# EAGLE board STM32-Schematic-Design (EAGLE 9.6.2)
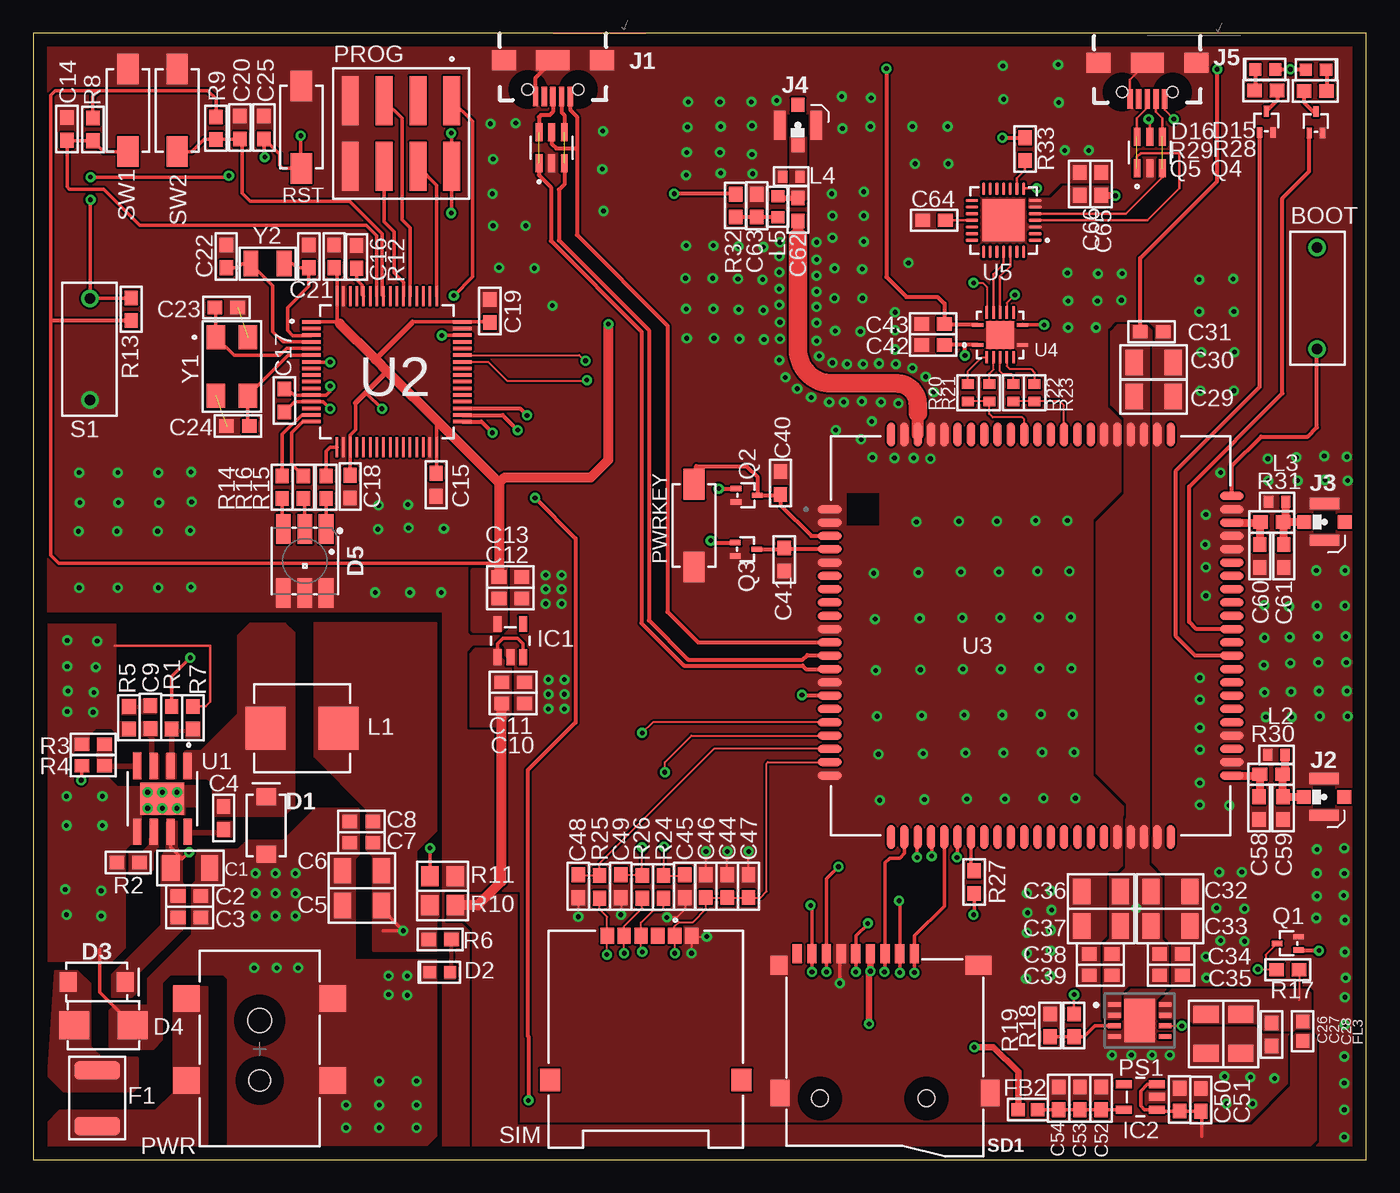
[diagram p0: board, top side]
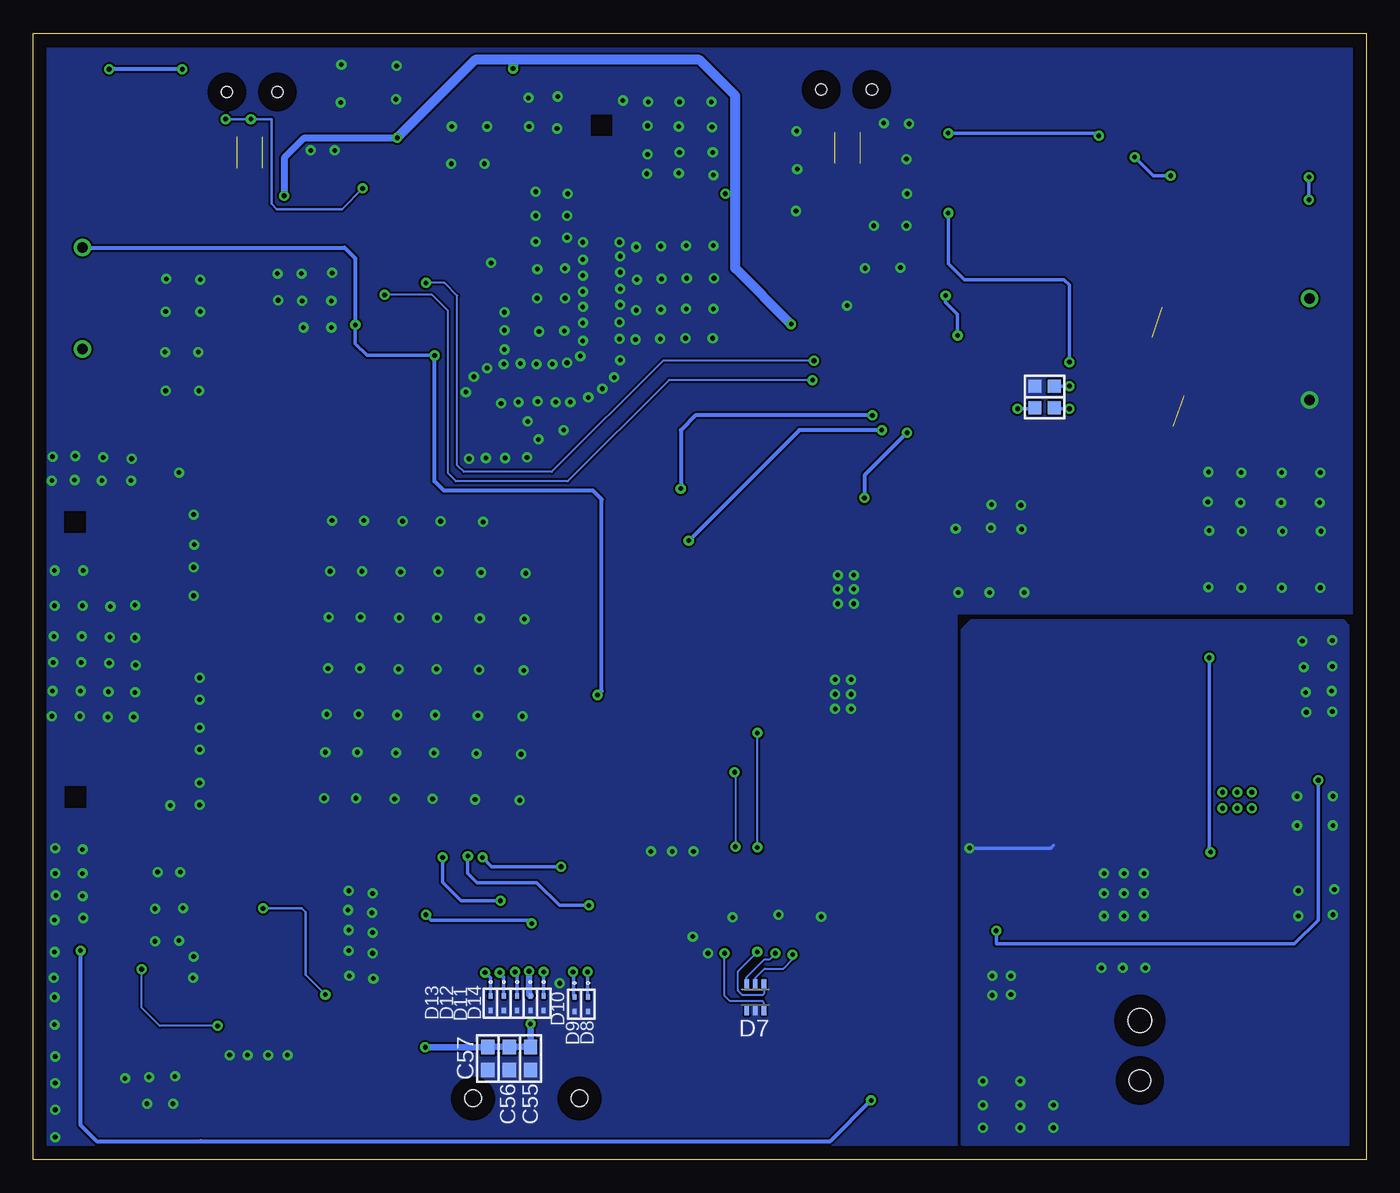
[diagram p1: board, bottom side, seen from below]

Size 100.15 x 84.6 mm. Coordinates in mm from the lower left corner, seen from the top.
Outline: 0,0 100.15,0 100.15,84.6 0,84.6 0,0
Copper layers (1*16): Top 0.035mm / dielectric 1.5mm / Bottom 0.035mm
Design rules "default": minimum track width 6mil, minimum drill 0.35mm, track to track 6mil, track to pad 6mil, pad to pad 6mil, via to via 6mil, smd to smd 6mil, copper to edge 40mil, drill to drill 6mil, minimum pad ring 10mil, minimum via ring 8mil, stop-mask expansion 4mil, vias tented up to drill 0mil, thermal gap 10mil

## Footprints (pad centres in the part's own frame; a part is rotated, then mirrored left to right if it is on the bottom)
418117270901 = drill 0.8: 1 0,-3.81; A1 0,3.81
CAPC3216X190N = smd 1.29 x 1.91: 1 -1.46,0; 2 1.46,0
C0603 = smd 1.1 x 1: 1 -0.909,0; 2 0.809,0
SMA-DIODE = smd 1.27 x 1.47: A -2.15,0; C 2.15,0
LEDC1608X65N = smd 0.91 x 0.93: A 0.76,0; C -0.76,0
DIONM5436X245N = smd 2.25 x 2.1: 1 -2.2,0; 2 2.2,0
LED-TRICOLOR-5050 = smd 2.2 x 1.1: 1 -2.4,1.6; 2 -2.4,0; 3 -2.4,-1.6; 4 2.4,-1.6; 5 2.4,0; 6 2.4,1.6
SOT95P280X145-6N = smd 1.36 x 0.6: 1 -1.175,0.95; 2 -1.175,0; 3 -1.175,-0.95; 4 1.175,-0.95; 5 1.175,0; 6 1.175,0.95
SC70-6 = smd 0.35 x 0.8: 1 -0.65,-0.95; 2 0,-0.95; 3 0.65,-0.95; 4 0.65,0.95; 5 0,0.95; 6 -0.65,0.95
SODFL1060X40N = smd 0.41 x 0.31: 1 -0.55,0; 2 0.55,0
FUSC4632X194N = smd 1.35 x 3.43: 1 -2.098,0; 2 2.098,0
BEADC1608X95N = smd 1 x 0.97: 1 -0.735,0; 2 0.735,0
SOT95P280X145-5N = smd 1.2 x 0.6: 1 -1.25,0.95; 2 -1.25,0; 3 -1.25,-0.95; 4 1.25,-0.95; 5 1.25,0.95
USB-B-MICRO-SMD = smd 1.45 x 0.4: D+ 2.725,0; D- 2.725,0.65; GND 2.725,-1.3; ID 2.725,-0.65; VBUS 2.725,1.3 | smd 1.5 x 1.8: SHIELD1 0,3.685; SHIELD2 0,-3.685 | smd 1.5 x 2.5: SHIELD3 0,0 | hole 0.85: 2.2,1.9; 2.2,-1.9
U.FL = smd 2.2 x 0.85: 1 0,1.375; 2 0,-1.375 | smd 1.05 x 1: FEED 1.525,0; NC -1.525,0
INDPM7266X300N = smd 3 x 3.2: 1 -2.75,0; 2 2.75,0
INDC1005X45 = smd 0.7 x 0.9: 1 -0.65,0; 2 0.65,0
INDC1608X95N = smd 0.9 x 0.97: 1 -0.785,0; 2 0.785,0
SAMTEC_TSM-104-02-S-DV-P = smd 1.27 x 3.68: 01 3.81,2.475; 02 3.81,-2.475; 03 1.27,2.475; 04 1.27,-2.475; 05 -1.27,2.475; 06 -1.27,-2.475; 07 -3.81,2.475; 08 -3.81,-2.475
SON80P400X400X100-9N = smd 0.95 x 0.35: 1 -1.9,1.2; 2 -1.9,0.4; 3 -1.9,-0.4; 4 -1.9,-1.2; 5 1.9,-1.2; 6 1.9,-0.4; 7 1.9,0.4; 8 1.9,1.2 | smd 2.3 x 3.23: 9 0,0
GCT_DCJ200-05-A-XX-X_REVA = smd 2 x 2: 1.1 -5.5,3.8; 1.2 -5.5,-2.35; 2 5.5,-2.35; 3 5.5,3.8 | hole 1.8: 0,2.15 | hole 1.6: 0,-2.35
SW_1437566-3 = smd 2.3 x 1.6: 1 -3.08,0; 2 3.12,0
SOT50P160X90-3N = smd 0.8 x 0.4: 1 -0.8,0.5; 2 -0.8,-0.5; 3 0.8,0
R0603 = smd 1.1 x 1: 1 -0.85,0; 2 0.85,0
RESC2012X60 = smd 1.3 x 1.5: 1 -0.95,0; 2 0.95,0
RESC1005X40 = smd 0.7 x 0.9: 1 -0.65,0; 2 0.65,0
TF-PULL = smd 0.7 x 1.4: 1 -2.2,-7.62; 2 -1.1,-7.62; 3 0,-7.62; 4 1.1,-7.62; 5 2.2,-7.62; 6 3.3,-7.62; 7 4.4,-7.62; 8 5.5,-7.62; 9 6.6,-7.62 | smd 1.4 x 2: S1 -7.9,2.85; S2 7.9,2.85 | smd 1.28 x 1.4: S3 7.96,-6.75 | smd 1.95 x 1.4: S4 -7.025,-6.75 | hole 1.25: -3.1,3.25; 4.9,3.25
XUNPU_SMC-216 = smd 1 x 1.2: C1 -2.18,-10.85; C2 -3.45,-10.85; C3 0.36,-10.85; C4 -0.91,-10.85; C5 2.9,-10.85; C6 1.63,-10.85 | smd 1.5 x 1.7: S1 -7.2,0; S2 7.2,0
SOIC127P600X170-9N = smd 1.97 x 0.6: 1 -2.475,1.905; 2 -2.475,0.635; 3 -2.475,-0.635; 4 -2.475,-1.905; 5 2.475,-1.905; 6 2.475,-0.635; 7 2.475,0.635; 8 2.475,1.905 | smd 2.41 x 3.3: 9 0,0
QFP50P1200X1200X160-64N = smd 1.47 x 0.25: 1 -5.67,3.75; 2 -5.67,3.25; 3 -5.67,2.75; 4 -5.67,2.25; 5 -5.67,1.75; 6 -5.67,1.25; 7 -5.67,0.75; 8 -5.67,0.25; 9 -5.67,-0.25; 10 -5.67,-0.75; 11 -5.67,-1.25; 12 -5.67,-1.75; 13 -5.67,-2.25; 14 -5.67,-2.75; 15 -5.67,-3.25; 16 -5.67,-3.75; 33 5.67,-3.75; 34 5.67,-3.25; 35 5.67,-2.75; 36 5.67,-2.25; 37 5.67,-1.75; 38 5.67,-1.25; 39 5.67,-0.75; 40 5.67,-0.25; 41 5.67,0.25; 42 5.67,0.75; 43 5.67,1.25; 44 5.67,1.75; 45 5.67,2.25; 46 5.67,2.75; 47 5.67,3.25; 48 5.67,3.75 | smd 0.25 x 1.47: 17 -3.75,-5.67; 18 -3.25,-5.67; 19 -2.75,-5.67; 20 -2.25,-5.67; 21 -1.75,-5.67; 22 -1.25,-5.67; 23 -0.75,-5.67; 24 -0.25,-5.67; 25 0.25,-5.67; 26 0.75,-5.67; 27 1.25,-5.67; 28 1.75,-5.67; 29 2.25,-5.67; 30 2.75,-5.67; 31 3.25,-5.67; 32 3.75,-5.67; 49 3.75,5.67; 50 3.25,5.67; 51 2.75,5.67; 52 2.25,5.67; 53 1.75,5.67; 54 1.25,5.67; 55 0.75,5.67; 56 0.25,5.67; 57 -0.25,5.67; 58 -0.75,5.67; 59 -1.25,5.67; 60 -1.75,5.67; 61 -2.25,5.67; 62 -2.75,5.67; 63 -3.25,5.67; 64 -3.75,5.67
IC_SIM7600E-H = smd 1.8 x 0.6: 1 -15.1,9.5; 2 -15.1,8.5; 3 -15.1,7.5; 4 -15.1,6.5; 5 -15.1,5.5; 6 -15.1,4.5; 7 -15.1,3.5; 8 -15.1,2.5; 9 -15.1,1.5; 10 -15.1,0.5; 11 -15.1,-0.5; 12 -15.1,-1.5; 13 -15.1,-2.5; 14 -15.1,-3.5; 15 -15.1,-4.5; 16 -15.1,-5.5; 17 -15.1,-6.5; 18 -15.1,-7.5; 19 -15.1,-8.5; 20 -15.1,-9.5; 41 15.1,-9.5; 42 15.1,-8.5; 43 15.1,-7.5; 44 15.1,-6.5; 45 15.1,-5.5; 46 15.1,-4.5; 47 15.1,-3.5; 48 15.1,-2.5; 49 15.1,-1.5; 50 15.1,-0.5; 51 15.1,0.5; 52 15.1,1.5; 53 15.1,2.5; 54 15.1,3.5; 55 15.1,4.5; 56 15.1,5.5; 57 15.1,6.5; 58 15.1,7.5; 59 15.1,8.5; 60 15.1,9.5; 81 -15.1,-10.5; 82 15.1,-10.5; 85 15.1,10.5 | smd 0.6 x 1.8: 21 -9.5,-15.1; 22 -8.5,-15.1; 23 -7.5,-15.1; 24 -6.5,-15.1; 25 -5.5,-15.1; 26 -4.5,-15.1; 27 -3.5,-15.1; 28 -2.5,-15.1; 29 -1.5,-15.1; 30 -0.5,-15.1; 31 0.5,-15.1; 32 1.5,-15.1; 33 2.5,-15.1; 34 3.5,-15.1; 35 4.5,-15.1; 36 5.5,-15.1; 37 6.5,-15.1; 38 7.5,-15.1; 39 8.5,-15.1; 40 9.5,-15.1; 61 9.5,15.1; 62 8.5,15.1; 63 7.5,15.1; 64 6.5,15.1; 65 5.5,15.1; 66 4.5,15.1; 67 3.5,15.1; 68 2.5,15.1; 69 1.5,15.1; 70 0.5,15.1; 71 -0.5,15.1; 72 -1.5,15.1; 73 -2.5,15.1; 74 -3.5,15.1; 75 -4.5,15.1; 76 -5.5,15.1; 77 -6.5,15.1; 78 -7.5,15.1; 79 -8.5,15.1; 80 -9.5,15.1; 83 10.5,-15.1; 84 -10.5,-15.1; 86 -10.5,15.1; 87 10.5,15.1
QFN50P350X350X100-15N = smd 0.9 x 0.26: 1 -1.685,-0.75; 7 1.685,-0.75; 8 1.685,0.75; 14 -1.685,0.75 | smd 0.26 x 0.9: 2 -1,-1.685; 3 -0.5,-1.685; 4 0,-1.685; 5 0.5,-1.685; 6 1,-1.685; 9 1,1.685; 10 0.5,1.685; 11 0,1.685; 12 -0.5,1.685; 13 -1,1.685 | smd 2.05 x 2.05: 15 0,0
QFN50P500X500X100-29N = smd 0.97 x 0.26: 1 -2.37,1.5; 2 -2.37,1; 3 -2.37,0.5; 4 -2.37,0; 5 -2.37,-0.5; 6 -2.37,-1; 7 -2.37,-1.5; 15 2.37,-1.5; 16 2.37,-1; 17 2.37,-0.5; 18 2.37,0; 19 2.37,0.5; 20 2.37,1; 21 2.37,1.5 | smd 0.26 x 0.97: 8 -1.5,-2.37; 9 -1,-2.37; 10 -0.5,-2.37; 11 0,-2.37; 12 0.5,-2.37; 13 1,-2.37; 14 1.5,-2.37; 22 1.5,2.37; 23 1,2.37; 24 0.5,2.37; 25 0,2.37; 26 -0.5,2.37; 27 -1,2.37; 28 -1.5,2.37 | smd 3.15 x 3.15: 29 0,0
XTAL_ABMM2-8.000MHZ-E2-T = smd 1.8 x 1.4: 1 -2.2,-1.2; 2 2.2,-1.2; 3 2.2,1.2; 4 -2.2,1.2
XTAL_ABS07-32.768KHZ-T = smd 1.1 x 1.9: 1 -1.25,0; 2 1.25,0

## Placement (x,y rotation side)
BOOT  418117270901  [418117270901]  96.45,64.7 0 top
C1  100uF  [CAPC3216X190N]  11.8,21.9 180 top
C2  10uF  [C0603]  11.7,19.8 180 top
C3  0.1uF  [C0603]  11.7,18.2 180 top
C4  0.1uF  [C0603]  14.31,25.61 270 top
C5  100uF  [CAPC3216X190N]  24.7,19.1 0 top
C6  100uF  [CAPC3216X190N]  24.7,21.7 0 top
C7  22uF  [C0603]  24.7,23.8 0 top
C8  0.1uF  [C0603]  24.7,25.4 0 top
C9  150pF  [C0603]  8.8,33.2 270 top
C10  0.1uF  [C0603]  36,34.26 180 top
C11  10uF  [C0603]  36,35.86 180 top
C12  10uF  [C0603]  35.8,42.16 180 top
C13  0.1uF  [C0603]  35.8,43.76 180 top
C14  0.1uF  [C0603]  2.53,77.37 270 top
C15  10uF  [C0603]  30.27,50.74 90 top
C16  0.1uF  [C0603]  22.6,67.8 270 top
C17  0.1uF  [C0603]  18.86,56.97 270 top
C18  0.1uF  [C0603]  23.8,50.6 90 top
C19  0.1uF  [C0603]  34.3,63.7 270 top
C20  0.1uF  [C0603]  15.53,77.47 270 top
C21  14pF  [C0603]  20.7,67.8 270 top
C22  14pF  [C0603]  14.5,67.8 270 top
C23  27pF  [C0603]  14.45,64.01 180 top
C24  27pF  [C0603]  15.43,55.09 0 top
C25  0.1uF  [C0603]  17.33,77.47 270 top
C26  100uF  [CAPC3216X190N]  88.12,9.45 90 top
C27  100uF  [CAPC3216X190N]  90.73,9.45 90 top
C28  0.1uF  [C0603]  93.03,9.45 90 top
C29  100uF  [CAPC3216X190N]  84.18,57.33 180 top
C30  100uF  [CAPC3216X190N]  84.18,59.88 180 top
C31  0.1uF  [C0603]  83.98,62.18 180 top
C32  100uF  [CAPC3216X190N]  85.43,20.15 180 top
C33  100uF  [CAPC3216X190N]  85.43,17.55 180 top
C34  0.1uF  [C0603]  85.43,15.45 180 top
C35  33pF  [C0603]  85.43,13.85 180 top
C36  100uF  [CAPC3216X190N]  80.23,20.15 0 top
C37  100uF  [CAPC3216X190N]  80.23,17.55 0 top
C38  0.1uF  [C0603]  80.23,15.45 0 top
C39  33pF  [C0603]  80.23,13.85 0 top
C40  0.1uF  [C0603]  56.14,50.77 270 top
C41  0.1uF  [C0603]  56.41,45.12 90 top
C42  0.1uF  [C0603]  67.65,61.18 0 top
C43  0.1uF  [C0603]  67.55,62.78 180 top
C44  0.1uF  [C0603]  52.13,20.49 270 top
C45  22pF  [C0603]  48.95,20.59 90 top
C46  10uF  [C0603]  50.53,20.49 270 top
C47  10pF  [C0603]  53.73,20.49 270 top
C48  22pF  [C0603]  40.95,20.59 90 top
C49  22pF  [C0603]  44.15,20.59 90 top
C50  10uF  [C0603]  86.13,4.46 270 top
C51  0.1uF  [C0603]  87.73,4.45 270 top
C52  10uF  [C0603]  80.23,4.56 270 top
C53  0.1uF  [C0603]  78.63,4.56 270 top
C54  22pF  [C0603]  77.03,4.56 270 top
C55  10uF  [C0603]  62.79,7.66 90 bottom
C56  0.1uF  [C0603]  64.39,7.66 90 bottom
C57  10pF  [C0603]  65.99,7.66 90 bottom
C58  DNP  [C0603]  92.1,26.45 90 top
C59  DNP  [C0603]  93.9,26.45 90 top
C60  DNP  [C0603]  92.16,45.4 90 top
C61  DNP  [C0603]  93.96,45.4 90 top
C62  22pF  [C0603]  57.45,71.31 270 top
C63  33pF  [C0603]  54.35,71.7 90 top
C64  4.7uF  [C0603]  67.73,70.55 0 top
C65  0.1uF  [C0603]  80.22,73.24 270 top
C66  4.7uF  [C0603]  78.62,73.24 270 top
D1  SS14  [SMA-DIODE]  17.5,25.1 90 top
D2  LED  [LEDC1608X65N]  30.56,14.08 0 top
D3  SS14  [SMA-DIODE]  4.76,13.35 0 top
D4  TVS  [DIONM5436X245N]  5.27,10.11 0 top
D5  RGB LED  [LED-TRICOLOR-5050]  20.4,44.96 270 top
D6  USBLC6-2SC6  [SOT95P280X145-6N]  38.95,76 90 top
D7  SMF05  [SC70-6]  45.9,12.2 0 bottom
D8  ESD9M5  [SODFL1060X40N]  58.48,11.67 270 bottom
D9  ESD9M5  [SODFL1060X40N]  59.48,11.67 270 bottom
D10  ESD9M5  [SODFL1060X40N]  61.8,11.75 270 bottom
D11  ESD9M5  [SODFL1060X40N]  63.8,11.75 270 bottom
D12  ESD9M5  [SODFL1060X40N]  64.8,11.75 270 bottom
D13  ESD9M5  [SODFL1060X40N]  65.8,11.75 270 bottom
D14  ESD9M5  [SODFL1060X40N]  62.8,11.75 270 bottom
D15  LTW-C191TLA  [LEDC1608X65N]  96.37,81.86 180 top
D16  LTW-C191TLA  [LEDC1608X65N]  92.56,81.88 0 top
D17  USBLC6-2SC6  [SOT95P280X145-6N]  83.88,75.65 90 top
F1  1.5A/16V  [FUSC4632X194N]  4.81,4.62 270 top
FB2  [BEADC1608X95N]  74.73,3.76 180 top
FL1  FB100  [BEADC1608X95N]  24.16,56.48 180 bottom
FL2  FB101  [BEADC1608X95N]  24.16,58.08 180 bottom
FL3  FB1  [BEADC1608X95N]  95.37,9.65 90 top
IC1  TLV70333DBVR  [SOT95P280X145-5N]  35.84,38.98 90 top
IC2  LP5907MFX-3.0  [SOT95P280X145-5N]  83.18,4.71 180 top
J1  Modem USB  [USB-B-MICRO-SMD]  39.04,82.57 270 top
J2  U.FL  [U.FL]  96.98,27.25 180 top
J3  U.FL  [U.FL]  97.02,47.9 180 top
J4  U.FL  [U.FL]  57.45,77.7 270 top
J5  Modem USB  [USB-B-MICRO-SMD]  83.7,82.4 270 top
L1  15uH  [INDPM7266X300N]  20.2,32.4 0 top
L2  LXES15AAA1-153  [INDC1005X45]  93.4,30.4 0 top
L3  LXES15AAA1-153  [INDC1005X45]  93.46,49.4 0 top
L4  LXES15AAA1-153  [INDC1005X45]  56.95,73.84 180 top
L5  47nH  [INDC1608X95N]  55.94,71.56 270 top
PROG  Prog/Debug Conn  [SAMTEC_TSM-104-02-S-DV-P]  27.63,77.07 0 top
PS1  LD39200DPUR  [SON80P400X400X100-9N]  83.12,10.45 0 top
PWR  DC POWER JACK  [GCT_DCJ200-05-A-XX-X_REVA]  17.01,8.3 0 top
PWRKEY  PWR_KEY_SW  [SW_1437566-3]  49.64,47.6 90 top
Q1  100mA/50V  [SOT50P160X90-3N]  94.26,16.24 180 top
Q2  100mA/50V  [SOT50P160X90-3N]  53.6,49.9 0 top
Q3  100mA/50V  [SOT50P160X90-3N]  53.55,45.85 0 top
Q4  100mA/50V  [SOT50P160X90-3N]  96.37,77.91 90 top
Q5  100mA/50V  [SOT50P160X90-3N]  92.64,77.94 90 top
R1  100k  [R0603]  10.4,33.2 90 top
R2  100k  [R0603]  7.13,22.33 0 top
R3  40.2k  [R0603]  4.5,31.2 0 top
R4  210k  [R0603]  4.5,29.58 0 top
R5  100k  [R0603]  7.2,33.2 270 top
R6  2k  [R0603]  30.56,16.54 180 top
R7  24.9k  [R0603]  12,33.2 270 top
R8  10k  [R0603]  4.48,77.38 270 top
R9  10k  [R0603]  13.73,77.47 270 top
R10  0R  [RESC2012X60]  30.75,19.09 0 top
R11  0R  [RESC2012X60]  30.75,21.3 0 top
R12  10k  [R0603]  24.3,67.8 270 top
R13  10k  [R0603]  7.36,63.87 90 top
R14  2k  [R0603]  18.7,50.5 270 top
R15  2k  [R0603]  22,50.5 270 top
R16  2k  [R0603]  20.3,50.5 270 top
R17  10k  [R0603]  94.26,14.26 0 top
R18  6.6k  [R0603]  78.19,10.09 90 top
R19  1k  [R0603]  76.39,10.09 270 top
R20  0R  [RESC1005X40]  70.23,57.6 90 top
R21  0R  [RESC1005X40]  71.83,57.6 90 top
R22  0R  [RESC1005X40]  73.63,57.6 90 top
R23  0R  [RESC1005X40]  75.23,57.6 90 top
R24  22R  [R0603]  47.35,20.49 90 top
R25  22R  [R0603]  42.55,20.49 90 top
R26  22R  [R0603]  45.75,20.49 90 top
R27  22R  [R0603]  70.7,20.85 90 top
R28  2k  [R0603]  96.32,80.26 0 top
R29  2k  [R0603]  92.6,80.3 180 top
R30  0R  [R0603]  93,28.95 0 top
R31  0R  [R0603]  93.06,47.9 0 top
R32  10R  [R0603]  52.78,71.67 90 top
R33  4.7k  [R0603]  74.52,75.9 270 top
RST  RST_SW  [SW_1437566-3]  20.13,77.57 270 top
S1  418117270901  [418117270901]  4.26,60.87 180 top
SD1  TF-HOLDER  [TF-PULL]  64,7.85 180 top
SIM  SMC-216  [XUNPU_SMC-216]  46.02,5.99 180 top
SW1  INPUT_SW1  [SW_1437566-3]  7.11,78.83 270 top
SW2  INPUT_SW2  [SW_1437566-3]  10.81,78.83 270 top
U1  MP1584EN-LF-Z  [SOIC127P600X170-9N]  9.7,27.1 270 top
U2  STM32L073RZT6  [QFP50P1200X1200X160-64N]  26.56,59.18 0 top
U3  SIM7600E-H  [IC_SIM7600E-H]  74.95,39.35 0 top
U4  TXB0104RGYR  [QFN50P350X350X100-15N]  72.64,61.94 0 top
U5  CP2102-GM  [QFN50P500X500X100-29N]  72.9,70.55 180 top
Y1  8MHz  [XTAL_ABMM2-8.000MHZ-E2-T]  14.92,59.58 270 top
Y2  32.768KHz  [XTAL_ABS07-32.768KHZ-T]  17.6,67.3 0 top

## Library data of the parts
BOOT S1 = PC_Switch_DIP; AVAILABILITY: Bad; DESCRIPTION: Dip Switch SPST 1 Position Through Hole Slide (Standard) Actuator 25mA 24VDC; MF: Wurth Electronics; MP: 418117270901; PACKAGE: None; PRICE: None
C1 C5 C6 C26 C27 C29 C30 C32 C33 C36 C37 = PC_Capacitor_1206; AVAILABILITY: Warning; DESCRIPTION: SMD Capacitor X5R(EIA) with Capacitance: 100uF Tol. 20%. Rated Voltage: 10Vdc; MF: Murata; MP: GRM31CR61A107ME05L; PACKAGE: 3216 Murata; PRICE: None; PURCHASE-URL: https://pricing.snapeda.com/search/part/GRM31CR61A107ME05L/?ref=eda
C2-C4 C7-C25 C28 C31 C34 C35 C38-C66 = PC_Capacitor_0603; AVAILABILITY: Good; DESCRIPTION: 0.1µF ±10% 50V Ceramic Capacitor X7R 0603 (1608 Metric); MF: TDK; MP: CGA3E2X7R1H104K080AA; PACKAGE: 1608 TDK; PRICE: None; PURCHASE-URL: https://pricing.snapeda.com/search/part/CGA3E2X7R1H104K080AA/?ref=eda
D1 D3 = SparkFun-DiscreteSemi; PROD_ID: DIO-08053
D2 D15 D16 = PC_LED_0603; AVAILABILITY: Warning; DESCRIPTION: White LED Indication - Discrete 3.1V 0603 (1608 Metric); MF: Lite-On; MP: LTW-C191TLA; PACKAGE: 0603 Lite-On; PRICE: None; PURCHASE-URL: https://pricing.snapeda.com/search/part/LTW-C191TLA/?ref=eda
D4 = PC_Diode_SMBJ12CA; ARROW_PART_NUMBER: SMBJ12CA; ARROW_PRICE-STOCK: https://www.arrow.com/en/products/smbj12ca/taiwan-semiconductor; DESCRIPTION: TAIWAN SEMICONDUCTOR - SMBJ12CA - DIODE, TVS, 12V, 600W, SMB; HEIGHT: 2.45mm; MANUFACTURER_NAME: Taiwan Semiconductor; MANUFACTURER_PART_NUMBER: SMBJ12CA; MOUSER_PART_NUMBER: 821-SMBJ12CA; MOUSER_PRICE-STOCK: https://www.mouser.co.uk/ProductDetail/Taiwan-Semiconductor/SMBJ12CA/?qs=tHU%2FlV7kTyRAeZbjda26tQ%3D%3D
D5 = SparkFun-LED; PROD_ID: DIO-10298
D6 D17 = PC_IC_USBLC6-2SC6; AVAILABILITY: Good; DESCRIPTION: 17V Clamp 5A (8/20µs) Ipp Tvs Diode Surface Mount SOT-23-6; MF: STMicroelectronics; MP: USBLC6-2SC6; PACKAGE: SOT-23-6 STMicroelectronics; PRICE: None; PURCHASE-URL: https://pricing.snapeda.com/search/part/USBLC6-2SC6/?ref=eda
D7 = PC_IC_SMF05C.TCT; AVAILABILITY: Warning; DESCRIPTION: 12.5V Clamp 8A (8/20µs) Ipp Tvs Diode Surface Mount SC-70-6; MF: Semtech; MP: SMF05C.TCT; PACKAGE: SOT-363 Diodes Inc.; PRICE: None; PURCHASE-URL: https://pricing.snapeda.com/search/part/SMF05C.TCT/?ref=eda
D8-D14 = PC_Diode_ESD9M50ST5G; AVAILABILITY: Good; DESCRIPTION: 9.8V Clamp 1A (8/20µs) Ipp Tvs Diode Surface Mount SOD-923; MF: ON Semiconductor; MP: ESD9M5.0ST5G; PACKAGE: SOD-923-2 ON Semiconductor; PRICE: None; PURCHASE-URL: https://pricing.snapeda.com/search/part/ESD9M5.0ST5G/?ref=eda
F1 = PC_Fuse_MINISMDC150F_24-2; AVAILABILITY: Good; DESCRIPTION: PTC Resettable Fuse 1.5A(hold) 3A(trip) 24VDC 20A 1W 1.5s 0.04Ohm SMD Solder Pad 4.83 X 3.41 X 1.94mm T/R Automotive; MF: TE Connectivity; MP: MINISMDC150F/24-2; PACKAGE: None; PRICE: None; PURCHASE-URL: https://pricing.snapeda.com/search/part/MINISMDC150F/24-2/?ref=eda
FB2 FL1-FL3 = PC_FerriteBead_BLM18AG601SZ1D; AVAILABILITY: Good; DESCRIPTION: 600 Ohms @ 100MHz 1 Signal Line Ferrite Bead 0603 (1608 Metric) 500mA 380mOhm; MF: Murata; MP: BLM18AG601SZ1D; PACKAGE: 1608 Murata; PRICE: None; PURCHASE-URL: https://pricing.snapeda.com/search/part/BLM18AG601SZ1D/?ref=eda
IC1 IC2 = PC_IC_TLV70333DBVR; ARROW_PART_NUMBER: TLV70333DBVR; ARROW_PRICE-STOCK: https://www.arrow.com/en/products/tlv70333dbvr/texas-instruments; DESCRIPTION: 300mA Low-IQ Low-Dropout (LDO) Regulator; HEIGHT: 1.45mm; MANUFACTURER_NAME: Texas Instruments; MANUFACTURER_PART_NUMBER: TLV70333DBVR; MOUSER_PART_NUMBER: 595-TLV70333DBVR; MOUSER_PRICE-STOCK: https://www.mouser.co.uk/ProductDetail/Texas-Instruments/TLV70333DBVR?qs=u4fy%2FsgLU9PpWywgVkWnzw%3D%3D
J1 J5 = SparkFun-Connectors; PROD_ID: CONN-11752
J2-J4 = SparkFun-Connectors; PROD_ID: CONN-09193; SF_ID: WRL-09144
L1 = PC_Inductor_15uH; ARROW_PART_NUMBER: ASPI-0630LR-150M-T15; ARROW_PRICE-STOCK: https://www.arrow.com/en/products/aspi-0630lr-150m-t15/abracon; DESCRIPTION: Fixed Inductors 15 UH 20%; HEIGHT: 3mm; MANUFACTURER_NAME: ABRACON; MANUFACTURER_PART_NUMBER: ASPI-0630LR-150M-T15; MOUSER_PART_NUMBER: 815-ASPI0630LR150T15; MOUSER_PRICE-STOCK: https://www.mouser.co.uk/ProductDetail/ABRACON/ASPI-0630LR-150M-T15/?qs=bWAYEm3xoCYKmwZKzI2%2F7Q%3D%3D
L2-L4 = PC_Diode_TVS_LXES15AAA1-153; AVAILABILITY: Good; DESCRIPTION: Clamp Ipp Tvs Diode Surface Mount 1005; MF: Murata; MP: LXES15AAA1-153; PACKAGE: 0402 Murata; PRICE: None; PURCHASE-URL: https://pricing.snapeda.com/search/part/LXES15AAA1-153/?ref=eda
L5 = PC_Inductor_0603; AVAILABILITY: Warning; DESCRIPTION: 47nH Shielded Multilayer Inductor 50mA 200mOhm Max 0603 (1608 Metric); MF: Abracon; MP: AIML-0603-47NK-T; PACKAGE: 1608 Taiyo Yuden; PRICE: None; PURCHASE-URL: https://pricing.snapeda.com/search/part/AIML-0603-47NK-T/?ref=eda
PROG = PC_Header_2_54mm_8_POS; AVAILABILITY: Bad; DESCRIPTION: Conn Unshrouded Header HDR 8 POS 2.54mm Solder ST SMD Tube; MF: Samtec; MP: TSM-104-02-S-DV-P; PACKAGE: None; PRICE: None; PURCHASE-URL: https://pricing.snapeda.com/search/part/TSM-104-02-S-DV-P/?ref=eda
PS1 = PC_LDO_LD39200DPUR; ARROW_PART_NUMBER: LD39200DPUR; ARROW_PRICE-STOCK: https://www.arrow.com/en/products/ld39200dpur/stmicroelectronics; DESCRIPTION: LDO Voltage Regulators Linear Voltage Regulators & Vref; HEIGHT: 1mm; MANUFACTURER_NAME: STMicroelectronics; MANUFACTURER_PART_NUMBER: LD39200DPUR; MOUSER_PART_NUMBER: 511-LD39200DPUR; MOUSER_PRICE-STOCK: https://www.mouser.co.uk/ProductDetail/STMicroelectronics/LD39200DPUR/?qs=BNh1ct5PoGR12uqpHRZU9g%3D%3D
PWR = PC_CON_DC_Power_Jack; AVAILABILITY: Warning; DESCRIPTION: Power Barrel Connector Jack 2.05mm ID (0.081), 5.50mm OD (0.217) Surface Mount, Right Angle; MF: Global Connector Technology; MP: DCJ200-05-A-K1-A; PACKAGE: None; PRICE: None; PURCHASE-URL: https://pricing.snapeda.com/search/part/DCJ200-05-A-K1-A/?ref=eda
PWRKEY RST SW1 SW2 = PC_Switch_1437566-3; AVAILABILITY: Good; COMMENT: 1437566-3; CONFIGURATION_POLE-THROW: Single Pole - Single Throw; CONTACT_CURRENT_RATING: 50 mA; DESCRIPTION: Tactile Switch SPST-NO Top Actuated Surface Mount; MF: TE Connectivity; MP: 1437566-3; PACKAGE: None; PRICE: None
Q1-Q5 = PC_IC_DTC143ZET1G; ARROW_PART_NUMBER: DTC143ZET1G; ARROW_PRICE-STOCK: https://www.arrow.com/en/products/dtc143zet1g/on-semiconductor; DESCRIPTION: ON Semiconductor, DTC143ZET1G NPN Digital Transistor, 100 mA 50 V 4.7 k, Ratio Of 0.1, 3-Pin SC-75; HEIGHT: 0.9mm; MANUFACTURER_NAME: ON Semiconductor; MANUFACTURER_PART_NUMBER: DTC143ZET1G; MOUSER_PART_NUMBER: 863-DTC143ZET1G; MOUSER_PRICE-STOCK: https://www.mouser.co.uk/ProductDetail/ON-Semiconductor/DTC143ZET1G/?qs=2OtswVQKCOGWcFMBzaldrg%3D%3D
R1-R9 R12-R19 R24-R33 = PC_Resistor_0603; MF: Yageo; RESISTOR: 0603
R10 R11 = PC_Resistor_0805; AVAILABILITY: Warning; DESCRIPTION: Thick Film Resistors - SMD; MF: Yageo; MP: RC0805FR-7W1K5L; PACKAGE: 0805 Yageo; PRICE: None; PURCHASE-URL: https://pricing.snapeda.com/search/part/RC0805FR-7W1K5L/?ref=eda
R20-R23 = PC_Resistor_0402; AVAILABILITY: Good; DESCRIPTION: 1 kOhms ±1% 0.063W, 1/16W Chip Resistor 0402 (1005 Metric) Moisture Resistant Thick Film; MF: Yageo; MP: RC0402FR-071KL; PACKAGE: 0402 Samtec; PRICE: None; PURCHASE-URL: https://pricing.snapeda.com/search/part/RC0402FR-071KL/?ref=eda
SD1 = PC_Holder_SD_Card
SIM = PC_Holder_SMC-216; AVAILABILITY: Unavailable; DESCRIPTION: Micro Sim Connector; MF: Xunpu; MP: SMC-216; PACKAGE: Package; PRICE: None
U1 = PC_IC_MP1584EN; AVAILABILITY: Warning; DESCRIPTION: Buck Switching Regulator IC Positive Adjustable 0.8V 1 Output 3A 8-SOIC (0.154, 3.90mm Width) Exposed Pad; MF: Monolithic Power; MP: MP1584EN-LF-Z; PACKAGE: SOIC-8 MPS; PRICE: None; PURCHASE-URL: https://pricing.snapeda.com/search/part/MP1584EN-LF-Z/?ref=eda
U2 = PC_IC_STM32L073RZT6; AVAILABILITY: Good; DESCRIPTION: ARM® Cortex®-M0+ STM32L0 Microcontroller IC 32-Bit 32MHz 192KB (192K x 8) FLASH 64-LQFP (10x10); MF: STMicroelectronics; MP: STM32L073RZT6; PACKAGE: LQFP-64 STMicroelectronics; PRICE: None; PURCHASE-URL: https://pricing.snapeda.com/search/part/STM32L073RZT6/?ref=eda
U3 = PC_Module_SIM7600E-H; AVAILABILITY: Unavailable; DESCRIPTION: Multi-Band LTE-TDD/LTE-FDD/HSPA+ and GSM/GPRS/EDGE module; MF: Simcom; MP: SIM7600E-H; PACKAGE: None; PRICE: None
U4 = PC_IC_TXB0104RGYR; AVAILABILITY: Good; DESCRIPTION: 4-Bit Bidirectional Voltage-Level Shifter with Auto Direction Sensing and +/-15 kV ESD Protect 14-VQFN -40 to 85; MF: Texas Instruments; MP: TXB0104RGYR; PACKAGE: VQFN-14 Texas Instruments; PRICE: None; PURCHASE-URL: https://pricing.snapeda.com/search/part/TXB0104RGYR/?ref=eda
U5 = PC_IC_CP2102-GM; AVAILABILITY: Good; DESCRIPTION: USB Bridge, USB to UART USB 2.0 UART Interface 28-QFN (5x5); MF: Silicon Labs; MP: CP2102-GM; PACKAGE: QFN-28 Silicon Labs; PRICE: None; PURCHASE-URL: https://pricing.snapeda.com/search/part/CP2102-GM/?ref=eda
Y1 = PC_Crystal_ABMM2-8.000MHZ-E2-T; AVAILABILITY: Good; DESCRIPTION: 8MHz ±20ppm Crystal 18pF 72 Ohms 4-SMD, No Lead; MF: Abracon; MP: ABMM2-8.000MHZ-E2-T; PACKAGE: SMD-4 Abracon; PRICE: None; PURCHASE-URL: https://pricing.snapeda.com/search/part/ABMM2-8.000MHZ-E2-T/?ref=eda
Y2 = PC_Crystal_ABS07-32.768KHZ-T; AVAILABILITY: Warning; DESCRIPTION: 32.768kHz ±20ppm Crystal 12.5pF 70 kOhms 2-SMD, No Lead; MF: Abracon; MP: ABS07-32.768KHZ-T; PACKAGE: SMD-2 Abracon LLC; PRICE: None; PURCHASE-URL: https://pricing.snapeda.com/search/part/ABS07-32.768KHZ-T/?ref=eda

## Nets
1.8V: BOOT.A1 C42.2 U3.15 U4.1 U4.8
3.3V: C12.2 C13.2 C15.2 C16.2 C18.2 C19.2 C43.1 C65.2 C66.2 FL1.2 IC1.5 R8.1 R9.1 R13.1 R32.2 R33.1 U2.1 U2.19 U2.32 U2.48 U2.64 U4.14 U5.6 U5.7
3V: C55.2 C56.2 C57.2 D14.1 FB2.2 SD1.4
5V: C10.2 C11.2 C50.2 C51.2 FL3.1 IC1.1 IC1.3 IC2.1 IC2.3 R10.2
AGND: C17.1 FL2.1 U2.12
AUX_ANT: C60.2 R31.1 U3.59
BOOT_CFG0: BOOT.1 U3.85
CP2102_TO_MODEM_RX: U4.11 U5.26
CP2102_TO_MODEM_TX: U4.12 U5.25
DBG_UART_RX: PROG.06 U2.54
DBG_UART_TX: PROG.05 U2.53
GND: C10.1 C11.1 C12.1 C13.1 C14.1 C15.1 C16.1 C18.1 C19.1 C20.1 C21.1 C22.1 C23.1 C24.1 C25.1 C26.1 C27.1 C28.1 C29.1 C30.1 C31.1 C32.1 C33.1 C34.1 C35.1 C36.1 C37.1 C38.1 C39.1 C40.1 C41.1 C42.1 C43.2 C44.1 C45.1 C46.1 C47.1 C48.1 C49.1 C50.1 C51.1 C52.1 C53.1 C54.1 C55.1 C56.1 C57.1 C58.1 C59.1 C60.1 C61.1 C63.2 C64.1 C65.1 C66.1 D5.4 D5.5 D5.6 D6.2 D7.2 D8.2 D9.2 D10.2 D11.2 D12.2 D13.2 D14.2 D17.2 FL2.2 IC1.2 IC2.2 J1.GND J1.SHIELD1 J1.SHIELD2 J1.SHIELD3 J2.1 J2.2 J3.1 J3.2 J4.1 J4.2 J5.GND J5.SHIELD1 J5.SHIELD2 J5.SHIELD3 L2.1 L3.1 L4.2 PROG.07 PROG.08 PS1.4 PS1.9 PWRKEY.1 Q1.2 Q2.2 Q3.2 Q4.2 Q5.2 R11.2 R12.1 R19.1 RST.1 S1.A1 SD1.6 SD1.S1 SD1.S2 SD1.S3 SD1.S4 SIM.C2 SW1.1 SW2.1 U2.18 U2.31 U2.47 U2.63 U3.1 U3.2 U3.5 U3.10 U3.14 U3.37 U3.40 U3.41 U3.43 U3.57 U3.58 U3.60 U3.61 U3.64 U3.65 U3.77 U3.78 U3.80 U3.81 U4.7 U4.15 U5.3 U5.29 Y1.2 Y1.4
GND-ISO: C1.1 C2.1 C3.1 C5.1 C6.1 C7.1 C8.1 D1.A D2.C D4.2 PWR.2 PWR.3 R2.1 R3.1 R5.2 R7.1 R11.1 U1.5 U1.9
GNSS_ANT: C62.2 U3.79
LED1: R14.1 U2.15
LED2: R15.1 U2.17
LED3: R16.1 U2.16
LTEMODEM_LDO_EN: Q1.1 U2.33
LTEMODEM_ON_OFF: Q2.1 U2.35
LTEMODEM_RST: Q3.1 U2.34
MAIN_ANT: C58.2 R30.1 U3.82
MCU_TO_MODEM_UART_RX: U2.42 U4.10
MCU_TO_MODEM_UART_TX: U2.43 U4.13
MODEM_RX: R22.1 R23.1 U3.68
MODEM_TX: R20.1 R21.1 U3.71
N$1: D17.1 D17.6 J5.D+ U5.4
N$2: R1.1 R7.2 U1.2
N$3: D3.A D4.1 F1.1
N$4: R2.2 U1.6
N$5: D17.3 D17.4 J5.D- U5.5
N$6: C4.2 U1.8
N$7: C4.1 D1.C L1.1 U1.1
N$8: R3.2 R4.2 U1.4
N$9: C9.2 U1.3
N$10: C9.1 R5.1
N$11: D2.A R6.1
N$12: F1.2 PWR.1.1 PWR.1.2
N$13: R33.2 U5.9
N$15: C64.2 U5.18
N$60: R12.2 U2.60
N$61: C21.2 U2.3 Y2.2
N$62: C22.2 U2.4 Y2.1
N$63: C23.2 U2.5 Y1.1
N$64: C24.2 U2.6 Y1.3
N$65: D5.3 R14.2
N$66: D5.1 R15.2
N$67: D5.2 R16.2
N$70: PS1.6 Q1.3 R17.1
N$71: PS1.3 R18.1 R19.2
N$72: C52.2 C53.2 C54.2 FB2.1 IC2.5
N$73: C26.2 C27.2 C28.2 FL3.2 PS1.7 PS1.8 R17.2
N$74: D7.4 R24.1 SIM.C3
N$75: D7.5 R25.1 SIM.C5
N$76: R21.2 U4.3
N$77: R20.2 U4.2
N$78: D7.6 R26.1 SIM.C6
N$79: R22.2 U4.4
N$80: R23.2 U4.5
N$81: Q4.3 R28.1
N$82: Q5.3 R29.1
N$83: D10.1 R27.1 SD1.5
N$84: D16.C R29.2
N$85: D15.C R28.2
N$86: C63.1 L5.2 R32.1
N$87: C59.2 J2.FEED L2.2 R30.2
N$88: C61.2 J3.FEED L3.2 R31.2
N$89: C62.1 J4.FEED L4.1 L5.1
NETLIGHT: Q4.1 U3.51
NRST: C25.2 PROG.02 R13.2 RST.2 S1.1 U2.7
PWRKEY: C40.2 PWRKEY.2 Q2.3 U3.3
RESET: C41.2 Q3.3 U3.4
SD_CLK: R27.2 U3.26
SD_CMD: D11.1 SD1.3 U3.21
SD_DATA0: D9.1 SD1.7 U3.22
SD_DATA1: D8.1 SD1.8 U3.23
SD_DATA2: D13.1 SD1.1 U3.24
SD_DATA3: D12.1 SD1.2 U3.25
SMPS_IN: C1.2 C2.2 C3.2 D3.C R1.2 U1.7
SMPS_OUT: C5.2 C6.2 C7.2 C8.2 L1.2 R4.1 R6.2 R10.1
STATUS: Q5.1 U3.49
SW1: C14.2 R8.2 SW1.2 U2.58
SW2: C20.2 R9.2 SW2.2 U2.57
SWCLK: PROG.04 U2.49
SWDIO: PROG.01 U2.46
USB_DN: D6.3 D6.4 J1.D- U3.12
USB_DP: D6.1 D6.6 J1.D+ U3.13
USB_VBUS: D6.5 J1.VBUS U3.11
USIM_CLK: C48.2 R25.2 U3.19
USIM_DATA: C49.2 R26.2 U3.17
USIM_RST: C45.2 R24.2 U3.18
USIM_VDD: C44.2 C46.2 C47.2 D7.3 SIM.C1 U3.20
VBUS: D17.5 J5.VBUS U5.8
VCC_LTEMODEM: C29.2 C30.2 C31.2 C32.2 C33.2 C34.2 C35.2 C36.2 C37.2 C38.2 C39.2 D15.A D16.A PS1.1 PS1.2 R18.2 U3.38 U3.39 U3.62 U3.63
VCCA: C17.2 FL1.1 U2.13
VPP: SIM.C4

## Tracks (layer width: path | path; a pad name or v marks a point on that pad's centre or on a via)
1.8V  (via drill 0.35)
  Top 0.25: v75.95,62.7 U4.8
  Top 0.3: U4.1 70,61.19 | 70,61.19 68.48,61.19 C42.2 | U3.15 57.8,34.85 v57.75,34.9 | v70,60.4 70,61.19 | U4.8
  Bottom 0.25: v70,60.4 75.05,60.4 75.95,61.3 v75.95,62.7
  Bottom 0.3: v57.75,34.9 57.45,35.2 57.45,49.6 58.1,50.25 69.3,50.25 70,50.95 v70,60.4 | BOOT.A1 76.76,68.51 75.95,67.7 v75.95,62.7
3.3V  (via drill 0.35)
  Top 0.253: 22.81,63.45 22.81,63.01 22.89,62.93 | 23.02,62.8 22.89,62.93 | 22.89,62.93 U2.1
  Top 0.254: 30.51,55.31 30.31,55.11 U2.32 30.31,51.59 C15.2 | 24.21,56.85 24.21,54.81 23.81,54.41 U2.19 23.81,51.42 C18.2 | 28.5,62.9 28.53,62.93 U2.48 34.26,62.93 C19.2 | v26.2,56.4 24.98,57.62 | C16.2 22.81,66.78 U2.64 22.81,63.45 | R9.1 13.73,79.67 13.1,80.3 4.9,80.3 | R8.1 4.48,79.88 4.9,80.3 | 4.9,80.3 1.64,80.3 1.3,79.96 1.3,63 | 1.3,63 1.3,45.4 1.9,44.8 34.99,44.8 | 1.32,63.02 1.3,63
  Top 0.3: R13.1 1.32,63.02 | U4.14 68.54,62.69 C43.1 68.46,64.29 67.95,64.8 65.6,64.8 64.1,66.3 v64.1,81.95 | R32.2 52.74,72.55 v48.15,72.55 | v72.8,76.75 R33.1
  Top 0.381: 25.71,60.11 28.5,62.9 | 24.21,56.85 24.98,57.62 26.47,59.11 26.71,59.11
  Top 0.508: v81.3,72.4 80.25,72.4 C65.2
  Top 0.76: 34.99,50.83 35.41,51.25 41.9,51.25 43.21,52.56 v43.21,62.76
  Top 0.762: C13.2 34.99,44.8 34.99,50.83 30.51,55.31 26.71,59.11 25.71,60.11 23.02,62.8
  Bottom 0.254: v26.2,56.4 24.97,56.4 FL1.2
  Bottom 0.3: v48.15,72.55 47.4,72.55
  Bottom 0.508: 72.85,76.7 79.85,76.7 81.3,75.25 v81.3,72.4
  Bottom 0.6: v72.8,76.75 72.85,76.7
  Bottom 0.76: v43.21,62.76 47.4,66.95 47.4,72.55 47.4,79.9 50.1,82.6 64.1,82.6 | 64.1,82.6 v64.1,81.95 | 64.1,82.6 66.95,82.6 v72.8,76.75
  pour Top (no thermals): 32.9,39.76 33,39.66 35.1,39.66 35.6,40.16 35.6,44.36 32.99,44.36 32.9,44.26
  pour Top (no thermals): 74.8,72.2 76.5,72.2 77.4,73.1 80.8,73.1 80.8,71.7 80.7,71.6 80.55,71.45 74.8,71.45
3V  (via drill 0.35)
  Top 0.5: FB2.2 74,6.6 72.15,8.45 v70.7,8.45 | SD1.4 v62.9,14.15 62.8,14.05 v62.8,10.2
  Bottom 0.5: v70.7,8.45 66.01,8.45 C57.2 C56.2 C55.2 v62.79,10.19 v62.8,10.2 | v62.9,14.15 62.9,12.4 D14.1
5V
  Top 0.152: 35.2,34.25 C10.2
  Top 0.254: IC1.1 34.9,38.76 35.3,39.16 36.4,39.16 36.79,38.76 IC1.3 | 87.8,1.75 87.8,3.56 C51.2 86.15,3.64 C50.2 84.54,3.65 IC2.1 83.49,3.76 83.2,4.05 83.2,5.15 83.71,5.66 IC2.3
  Top 0.762: 35.2,34.25 35.2,20.9 33.39,19.09 R10.2
  pour Top (no thermals): 32.8,32.56 35,32.56 35.9,33.46 35.9,36.96 35.2,37.66 35.2,38.26 35.1,38.36 33.2,38.36 32.8,37.96
  pour Top (no thermals): 31.1,19.9 36.35,19.9 36.35,2.6 91.6,2.6 94.5,5.5 94.5,9.1 94.9,9.5 95.9,9.5 96.4,9 96.4,1.5 95.3,0.4 33.65,0.4 33,1.05 33,17.4 32.4,18 31.2,18 31.1,18.1
AGND  (via drill 0.35)
  Top 0.254: C17.1 19.12,57.88 19.6,57.4 20.86,57.4 | 20.86,57.4 U2.12 | v22.3,58.1 22.3,57.7 22,57.4 20.86,57.4
  Bottom 0.254: FL2.1 22.42,58.08 22.4,58.1 v22.3,58.1
AUX_ANT
  Top 0.6: U3.59 92.16,47.85 R31.1 92.16,47.85 C60.2
BOOT_CFG0
  Top 0.3: U3.85 90.05,52.1 92.25,54.3 95.75,54.3 96.45,55 BOOT.1
CP2102_TO_MODEM_RX
  Top 0.2: U5.26 73.4,67.1 72.64,66.34 U4.11
CP2102_TO_MODEM_TX
  Top 0.2: U5.25 72.9,67.25 72.14,66.49 U4.12
DBG_UART_RX
  Top 0.254: PROG.06 26.36,70.44 27.1,69.7 27.1,66.6 27.81,65.89 U2.54
DBG_UART_TX
  Top 0.254: PROG.05 27.7,78.21 27.7,70.6 28.31,69.99 U2.53
GND  (via drill 0.35)  (2 unrouted)
  Top 0.152: v49.45,15.5 49.47,15.52 SIM.C2 49.55,16.75 v50.6,16.75 | C47.1 53.73,23.13 v53.75,23.15 | C44.1 52.13,23.13 v52.15,23.15 | C46.1 50.53,23.13 v50.55,23.15 | C45.1 48.95,18.8 48.35,18.2 v47.6,18.2 | C49.1 44.15,18.65 v44.15,18.4 | C48.1 40.95,18.35 v40.95,18.25
  Top 0.2: J5.GND 82.4,81.1 J5.SHIELD3
  Top 0.254: SD1.6 60.6,15.37 v60.6,13.25
  Top 0.305: J1.GND 37.74,81.27 J1.SHIELD3
  other vias: 38.5,42.86 98.55,18 98.5,1.7 98.5,3.75 98.5,5.75 98.5,7.75 98.55,10.15 98.55,12.2 98.6,13.65 96.4,18.15 98.45,19.85 96.45,19.8 96.45,21.5 98.55,15.6 98.5,21.5 98.5,23.4 96.45,23.3 39.9,36.06 39.9,34.96 39.9,33.86 38.7,33.86 38.7,34.96 38.7,36.06 38.5,41.76 38.5,43.91 39.7,43.91 39.7,42.86 39.7,41.76 89.85,26.6 87.65,26.65 87.65,28.3 87.65,30.8 87.65,32.45 87.65,34.55 87.65,36.2 98.75,33.3 96.65,33.3 94.55,33.25 92.6,33.25 92.5,35.1 94.5,35.15 96.6,35.2 98.7,35.2 98.65,37.35 96.55,37.35 94.45,37.3 92.45,37.15 92.5,39.2 94.4,39.25 96.5,39.3 98.6,39.3 98.55,41.6 96.45,41.6 94.35,41.55 92.5,41.65 98.55,44.25 96.4,44.25 88.1,42.35 88.1,44.5 88.05,46.2 88.1,48.45 89.2,51.6 92.8,51 92.75,52.65 95,51 94.9,52.75 97.05,51.05 97,52.85 98.7,52.8 98.75,51 60.75,79.85 62.95,79.75 62.9,77.6 60.8,77.45 60,72.55 62.4,72.7 62.4,70.9 60.05,70.9 60.05,69.25 62.4,68.95 62.28,66.89 60.2,66.94 58.85,68.9 58.85,67.6 58.85,66.4 58.85,65.2 58.85,64.05 60.2,64.7 62.3,64.7 64.75,62.3 64.75,60.85 64.75,63.65 58.85,62.85 58.85,61.5 60.25,62.25 62.15,62.2 59.05,60.35 60.05,59.85 61.15,59.75 62.35,59.75 63.55,59.8 64.8,59.75 66.05,59.45 67.05,58.8 67.65,57.65 55.85,79.55 53.95,79.45 51.6,79.45 49.2,79.45 49.15,77.55 51.65,77.6 54,77.65 54,75.5 51.6,75.65 49.1,75.65 49.05,73.95 51.65,74.1 54.05,74.05 49.05,68.65 51.1,68.65 53,68.6 54.85,68.55 56.1,68.9 56.05,67.85 56.05,66.65 56.05,65.4 54.8,66.1 52.95,66.15 51.05,66.2 49,66.2 49.05,63.9 56.05,64.2 54.85,63.8 53,63.85 51.1,63.9 49.1,61.7 51.15,61.7 53.05,61.65 54.9,61.6 56.1,62.9 56.1,61.65 56.05,60.05 56.5,58.75 57.4,57.9 58.45,57.25 59.8,56.9 60.9,56.9 62.25,56.95 63.7,56.9 65,56.8 63,55.45 60.3,54.8 62.2,54.1 63.05,52.75 64.7,52.7 66.15,52.7 67.4,52.65 25.7,42.6 28.15,49.2 28.2,47.45 25.9,47.35 25.95,49.15 28.3,42.6 30.65,42.6 30.85,47.4 3.45,51.6 6.35,51.6 9.4,51.6 11.85,51.65 3.5,49.35 6.4,49.35 9.45,49.35 11.9,49.4 3.4,47.2 6.3,47.2 9.35,47.2 11.8,47.25 3.45,42.95 6.35,42.95 9.4,42.95 11.85,43 77.5,75.8 79.3,75.8 34.35,77.8 36.25,77.85 34.55,75.15 37,70.15 34.5,72.55 34.55,70.15 35,67 37.65,66.95 39,64.15 42.8,77.25 42.75,74.4 42.85,71.25 66.05,77.6 68.7,77.6 66.25,74.8 68.75,74.8 65.75,67.35 87.6,66.1 87.6,63.7 87.75,60.65 87.7,57.75 90.2,57.75 90.25,60.65 90.2,63.7 90.15,66.15 72.85,82.15 77,82.25 72.9,79.65 77.05,79.4 63.15,44.05 66.5,44.1 69.7,44.15 72.55,44.15 75.45,44.2 77.85,44.2 77.7,66.6 80,66.55 81.8,66.55 77.75,64.5 79.95,64.5 81.75,64.55 77.75,62.5 79.85,62.5 63.25,40.6 66.6,40.65 69.8,40.7 72.65,40.7 75.55,40.75 77.95,40.75 63.3,36.75 66.65,36.8 69.85,36.85 72.7,36.85 75.6,36.9 78,36.9 63.4,33.3 66.75,33.35 69.95,33.4 72.8,33.4 75.7,33.45 78.1,33.45 66.35,47.9 69.55,47.95 72.4,47.95 75.3,48 77.7,48 63.5,30.45 66.85,30.5 70.05,30.55 72.9,30.55 75.8,30.6 78.2,30.6 76.45,20.2 76.5,18.75 76.45,17.25 76.45,15.7 76.4,13.8 63.6,27 66.95,27.05 70.15,27.1 73,27.1 75.9,27.15 78.3,27.15 74.65,20 74.7,18.55 74.65,17.05 74.65,15.5 74.6,13.6 89.1,21.6 88.9,18.9 89.2,16.45 88.1,15.25 88.15,13.65 81.05,7.85 82.5,7.85 84.05,7.85 85.4,7.85 89.5,6.25 91.45,6.2 89.65,4.2 91.6,4.2 93.25,6.1 90.8,21.6 91,18.85 91,16.4
  pour Top (rank 2, no thermals): 0.5,84.25 99.9,84.25 99.9,0.2 30.8,0.2 30.8,41.15 0.45,41.15 0.45,84.25
  pour Bottom (rank 2, no thermals): 1,83.55 99.8,83.55 99.8,0.35 30.75,0.35 30.75,41.05 1,41.05
GND-ISO  (via drill 0.35)
  Top 0.203: R7.1 12.95,34.05 13.3,34.4 13.3,38.6 6.1,38.6
  Top 0.254: D4.2 5,12.58 5,15.8 | R11.1 v29.8,23.4
  Bottom 0.254: v29.8,23.4 23.7,23.4 23.5,23.6
  other vias: 4.8,38.95 2.55,39 2.55,37.05 4.7,37 2.6,35.2 4.55,35.1 2.55,33.65 4.5,33.6 2.5,27.3 2.5,25.1 5.2,27.3 5.2,25.1 5.1,20.2 2.4,20.3 2.5,18.4 5.1,18.3 16.7,21.5 16.7,20 16.7,18.3 18.2,20 18.2,21.5 18.2,18.3 19.7,18.3 19.7,20 19.7,21.5 16.6,14.4 18.3,14.4 19.9,14.4 26.7,13.8 28.1,13.8 26.7,12.4 28.1,12.35 26,5.9 28.8,5.9 28.8,4.1 26,4.1 23.5,4.1 23.5,2.4 26,2.4 28.8,2.4
  pour Top (no thermals): 5.7,11.2 5.7,8.5 5.9,8.3 9,8.3 9.7,9 9.7,13.3 10.3,13.9 14.3,13.9 14.6,13.6 14.6,1.1 29.6,1.1 30.3,1.8 30.3,15 24.3,15 24.2,14.9 24.2,22.6 24.5,22.9 24.5,26.3 24.4,26.4 21.2,26.4 18.8,24 16.1,24 15.4,23.3 12.4,23.3 12.2,23.1 12.2,20.9 11.9,20.6 11.9,16.9 8.6,13.6 8.6,11.6 6.1,11.6
  pour Top (no thermals): 0.8,14.9 5.9,14.9 6.9,15.9 6.9,23.3 7.3,23.7 8.1,23.7 8.1,25.9 11.4,25.9 11.4,26.5 12.3,26.5 12.3,28.1 11.3,28.1 11.3,28.3 8.1,28.3 8.1,28 6.3,28 5.7,28.6 2.8,28.6 2.6,28.8 2.6,30.2 3.1,30.7 4.2,30.7 4.2,31.9 4.7,32.4 5.9,32.4 6.5,31.8 7.7,31.8 7.7,32.9 6.2,32.9 6.2,40.2 0.6,40.2 0.6,15.1
  pour Bottom (no thermals): 1.3,1 1.3,40.1 1.7,40.5 29.7,40.5 30.4,39.8 30.4,1.2 29.7,0.5 1.8,0.5
GNSS_ANT
  Top 0.762: C62.2 57.45,69.3
  Top 0.889: U3.79 66.45,56.05
  Top 1.384: 66.45,56.05 66.45,56.75 arc90 64.9,58.3 59.99,58.3 arc-90 57.45,60.84 57.45,69.3
LED1
  Top 0.254: U2.15 20.15,55.93 18.7,54.47 R14.1
LED2
  Top 0.254: R15.1 22,53.2 22.31,53.51 U2.17
LED3
  Top 0.254: R16.1 19.4,52.25 19.4,54.6 20.23,55.43 U2.16
LTEMODEM_LDO_EN  (via drill 0.35)
  Top 0.152: 95.1,15.7 Q1.1
  Top 0.3: U2.33 33.67,55.43 v34.5,54.6 | v37.7,49.7 40.75,46.65 40.75,32.85 37.15,29.25 37.15,9.3 37.2,9.25 v37.2,4.45 | v96.6,15.7 95.1,15.7
  Bottom 0.3: v34.5,54.6 37.7,51.4 v37.7,49.7 | v37.2,4.45 40.26,1.39 87.55,1.39 95.4,1.39 96.6,2.59 v96.6,15.7
LTEMODEM_ON_OFF  (via drill 0.35)
  Top 0.3: U2.35 36.57,56.43 v37.1,55.9 | v51.5,50.4 Q2.1
  Bottom 0.3: v37.1,55.9 50.4,55.9 51.5,54.8 v51.5,50.4
LTEMODEM_RST  (via drill 0.35)
  Top 0.3: U2.34 35.27,55.93 v36.4,54.8 | v50.9,46.5 51.05,46.35 Q3.1
  Bottom 0.3: v36.4,54.8 42.6,54.8 v50.9,46.5
MAIN_ANT
  Top 0.6: U3.82 92.05,28.85 R30.1 92.15,27.31 C58.2
MCU_TO_MODEM_UART_RX  (via drill 0.35)
  Top 0.152: U2.42 34.17,59.93 35.6,58.5 41.6,58.5 v41.6,58.55 | v73.75,64.95 73.14,64.34 U4.10
  Bottom 0.152: v41.6,58.55 52.4,58.55 60,50.95 68.38,50.95 69,51.57 69,63.75 70.2,64.95 v73.75,64.95
MCU_TO_MODEM_UART_TX  (via drill 0.35)
  Top 0.152: U2.43 41.02,60.43 41.45,60 v41.5,60 | v70.65,65.85 71.35,65.85 71.64,65.56 U4.13
  Bottom 0.152: v41.5,60 52.85,60 61.2,51.65 67.8,51.65 68.3,52.15 68.3,64.9 69.25,65.85 v70.65,65.85
MODEM_RX
  Top 0.152: U3.68 77.45,56.65 77.15,56.95 R23.1 R22.1
MODEM_TX
  Top 0.152: U3.71 74.45,55.6 74.3,55.75 72.1,55.75 71.83,56.02 R21.1 R20.1
N$1  (1 unrouted)
  Top 0.2: D17.6 82.91,76.85 82.91,78.2 83.7,79 J5.D+ | D17.1 82.93,75.33 83.2,75.6 86.1,75.6 86.1,72.95 83.7,70.55 U5.4
N$2
  pour Top (no thermals): 10,28.6 10,30.5 10.3,30.5 10.3,31.8 9.9,31.8 9.9,32.9 10.9,32.9 10.9,32.3 11.5,32.3 11.5,32.9 12.5,32.9 12.5,31.7 11.5,31.7 11.5,32.1 10.9,32.1 10.9,31.8 10.5,31.8 10.5,30.5 10.7,30.5 10.7,28.6
N$3
  pour Top (no thermals): 2.3,14.2 3.3,14.2 4.3,13.2 4.3,8.5 5.1,7.7 7.8,7.7 7.9,7.6 7.9,5.5 7.5,5.1 2.3,5.1 1.1,6.3 1.6,14.2
N$4
  pour Top (no thermals): 7.2,23.1 7.2,21.4 8.6,21.4 9,21.8 9,23.1 9.4,23.5 9.4,25.5 9.3,25.6 8.8,25.6 8.7,23.6 8.2,23.1
N$5  (1 unrouted)
  Top 0.2: D17.4 84.83,78.22 84.35,78.7 84.35,79.27 | D17.3 84.83,73.78 82.1,71.05 U5.5
  Top 0.253: J5.D- 84.35,79.27
N$6
  pour Top (no thermals): 13.9,25.4 14.9,25.4 14.9,24.2 13.9,24.2 13.8,24.3 13.8,24.5 13.7,24.4 11.9,24.4 11.9,23.7 11.3,23.7 11.3,25.6 11.9,25.6 11.9,24.7 13.8,24.7 13.8,25.3
N$7
  pour Top (no thermals): 11.3,28.6 11.3,30.5 11.5,30.7 12.6,30.7 15.4,33.5 15.4,39.4 16.3,40.3 18.9,40.3 19.6,39.6 19.6,26.6 18.8,25.8 13.6,25.8 13.5,25.9 13.5,28.2 13.1,28.6
N$8
  pour Top (no thermals): 4.8,31.7 4.8,29.1 5.9,29.1 5.9,29.4 7.5,29.4 7.5,28.6 8.1,28.6 8.1,30.6 7.5,30.6 7.5,29.7 5.9,29.7 5.9,31.7
N$9
  pour Top (no thermals): 8.2,32.9 9.3,32.9 9.3,31.8 8.9,31.8 9,31.7 9,30.5 9.3,30.5 9.4,30.4 9.4,28.6 8.8,28.6 8.8,31.6 8.6,31.8 8.2,31.8
N$10
  pour Top (no thermals): 6.7,34.6 7.7,34.6 7.7,34.1 8.2,34.1 8.2,34.6 9.2,34.6 9.2,33.5 8.2,33.5 8.2,33.9 7.7,33.9 7.7,33.4 6.7,33.4
N$11
  pour Top (no thermals): 30.9,17.1 30.9,16.1 31.3,16.1 31.3,14.6 31.2,14.5 30.9,14.5 30.9,13.6 31.7,13.6 31.7,14.5 31.5,14.5 31.5,16.1 32,16.1 32,17.1
N$12
  pour Top (no thermals): 10.5,13 13.1,13 13.1,0.9 12.5,0.3 1.1,0.3 1,0.4 1,2.7 2,3.7 9.2,3.7 10.5,5
N$13
  Top 0.2: R33.2 74.52,74.32 73.9,73.7 U5.9
N$15
  Top 0.2: U5.18 C64.2
N$43  (via drill 0.35)
  other vias: 8.6,27.6
N$44  (via drill 0.35)
  other vias: 8.6,26.4
N$45  (via drill 0.35)
  other vias: 9.7,27.6
N$46  (via drill 0.35)
  other vias: 10.8,27.6
N$47  (via drill 0.35)
  other vias: 10.8,26.4
N$48  (via drill 0.35)
  other vias: 9.7,26.4
N$60
  Top 0.254: U2.60 24.72,64.94 24.72,65.68 24.3,66.1 R12.2
N$61
  Top 0.254: Y2.2 19.5,67.3 19.81,66.99 C21.2 20.7,65.6 19.1,64 19.1,62.3 19.5,61.9 20.86,61.9 U2.3
N$62
  Top 0.254: U2.4 18.77,61.43 18,62.2 18,65.65 Y2.1 15.7,67.3 15.39,66.99 C22.2
N$63
  Top 0.254: C23.2 13.71,63.94 Y1.1 15.09,60.4 18.5,60.4 19.03,60.93 U2.5
N$64
  Top 0.254: C24.2 16.11,55.22 Y1.3 19.17,60.43 U2.6
N$65
  Top 0.254: D5.3 18.7,47.46 R14.2
N$66
  Top 0.254: D5.1 R15.2
N$67
  Top 0.254: D5.2 20.4,49.55 R16.2
N$68
  cutout Top: 12.8,63 17,63 17.1,62.9 17.1,56.3 17,56.2 12.9,56.2 12.7,56.4 12.7,62.9
N$69
  cutout Top: 15.7,68.5 19.6,68.5 19.7,68.4 19.7,66.2 19.6,66.1 15.6,66.1 15.5,66.2 15.5,68.4 15.6,68.5
N$70  (via drill 0.35)
  Top 0.152: PS1.6 85.9,10.05 v86.3,10.05 | v92,14.3 92.6,14.3 | 92.6,14.3 93.37,14.3 R17.1 | Q1.3 92.6,15.38 92.6,14.3
  Bottom 0.152: v86.3,10.05 90.65,10.05 92,11.4 v92,14.3
N$71
  Top 0.254: R19.2 R18.1 78.94,9.24 79.75,10.05 PS1.3
N$72
  Top 0.254: IC2.5 C52.2 C53.2 C54.2 FB2.1
N$73
  Top 0.152: R17.2 95.11,12.01 95.1,12
  pour Top (no thermals): 84.6,11.8 84.6,10.7 84.7,10.6 86.8,10.6 87.2,10.2 92,10.2 92.5,9.7 94.7,9.7 94.8,9.8 95.9,9.8 96,9.9 96,12.5 95.7,12.8 85.6,12.8
N$74  (via drill 0.35)
  Top 0.152: v45.75,15.6 45.66,15.7 SIM.C3 45.66,17.81 46.6,18.75 47.2,18.75 47.35,18.9 R24.1
  Bottom 0.152: D7.4 45.25,12.45 45.35,12.35 46.85,12.35 47.2,12.7 47.2,14.15 v45.75,15.6
N$75  (via drill 0.35)
  Top 0.152: v43.1,15.4 43.1,16.82 SIM.C5 43.12,18.23 42.55,18.8 R25.1
  Bottom 0.152: D7.5 45.9,13.65 45.2,14.35 43.8,14.35 43.1,15.05 v43.1,15.4
N$76
  Top 0.152: R21.2 71.83,59.03 72.14,59.34 U4.3
N$77
  Top 0.152: R20.2 70.23,59.23 71.26,60.26 U4.2
N$78  (via drill 0.35)
  Top 0.152: v44.4,15.5 44.4,16.82 SIM.C6 44.39,17.54 45.75,18.9 R26.1
  Bottom 0.152: v44.4,15.5 44.4,15.45 44.8,15.05 45.2,15.05 46.55,13.7 D7.6
N$79
  Top 0.152: R22.2 73.63,58.87 73.5,59 72.85,59 72.64,59.21 U4.4
N$80
  Top 0.152: U4.5 73.15,59.6 73.35,59.4 74.95,59.4 75.23,59.12 R23.2
N$81
  Top 0.3: R28.1 95.47,79.43 96.19,78.71 Q4.3
N$82
  Top 0.3: R29.1 93.45,79.55 Q5.3
N$83  (via drill 0.35)
  Top 0.254: v61.8,14.1 SD1.5 61.8,16.8 62.7,17.7 v62.7,17.75 | R27.1 70.7,18.45 v70.65,18.4
  Bottom 0.254: v61.8,14.1 D10.1 | v62.7,17.75 62.95,18 70.25,18 v70.65,18.4
N$84
  Top 0.3: D16.C 91.8,80.35 R29.2
N$85
  Top 0.3: D15.C 97.17,81.82 R28.2
N$86
  Top 0.3: L5.2 54.36,70.78 C63.1 52.8,70.79 R32.1
N$87
  Top 0.6: L2.2 94.05,29.15 R30.2 93.85,27.31 C59.2 93.91,27.25 J2.FEED
N$88
  Top 0.6: R31.2 93.91,46.26 C61.2 | R31.2 94.11,48.1 L3.2 | R31.2 J3.FEED
N$89
  Top 0.4: C62.1 56.07,72.22 L5.1
  pour Top (no thermals): 56.85,76.8 58.1,76.8 58.1,72.1 56.85,72.1
NETLIGHT
  Top 0.3: U3.51 87.4,39.85 86.85,40.4 86.85,50.55 93.85,57.55 93.85,72.2 95.87,74.22 Q4.1
NRST  (via drill 0.35)
  Top 0.254: R13.2 7.32,64.68 S1.1 4.26,72.06 v4.3,72.1 | v4.3,73.8 14.6,73.8 v14.7,73.9 | v17.4,75.3 17.33,75.37 C25.2 18.5,75.5 18.5,74.7 18.75,74.45 RST.2 20.1,74.49 v20.1,76.9 | v31.4,77.1 31.44,77.06 PROG.02 31.44,71.14 v31.4,71.1 | v22.3,59.9 20.92,59.9 U2.7
  Bottom 0.254: v14.7,73.9 16,73.9 v17.4,75.3 | v4.3,72.1 v4.3,73.8 | v31.4,77.1 20.3,77.1 v20.1,76.9 | v31.4,71.1 31.4,67.3 30.2,66.1 22.7,66.1 22.3,65.7 v22.3,59.9
PWRKEY
  Top 0.152: 56.08,49.9 C40.2
  Top 0.3: 56.08,49.9 Q2.3 54.4,51.3 53.6,52.1 49.8,52.1 49.8,50.88 PWRKEY.2 | C40.2 56.14,49.16 58.45,46.85 U3.3
RESET
  Top 0.152: 56.33,45.85 C41.2 56.49,45.85
  Top 0.3: Q3.3 56.33,45.85 | U3.4 56.49,45.85
SD_CLK
  Top 0.254: U3.26 70.45,21.95 R27.2
SD_CMD  (via drill 0.35)
  Top 0.254: v63.95,14.1 64,14.05 SD1.3 64,22.3 64.35,22.65 65.1,22.65 65.45,23 U3.21
  Bottom 0.254: v63.95,14.1 63.8,13.95 D11.1
SD_DATA0  (via drill 0.35)
  Top 0.254: v59.6,14.1 SD1.7 59.6,21.1 v60.5,22 | v66.4,22.7 66.4,24.2 U3.22
  Bottom 0.254: v59.6,14.1 59.55,14.05 59.55,12.3 D9.1 | v60.5,22 65.7,22 v66.4,22.7
SD_DATA1  (via drill 0.35)
  Top 0.254: v58.5,14.1 SD1.8 58.5,19 v58.4,19.1 | v67.5,22.8 67.5,24.2 U3.23
  Bottom 0.254: v58.5,14.1 58.5,12.25 D8.1 | v58.4,19.1 60.62,19.1 62.33,20.81 66.8,20.81 67.5,21.51 v67.5,22.8
SD_DATA2  (via drill 0.35)
  Top 0.254: v66.2,14.05 SD1.1 66.2,16.8 68.45,19.05 U3.24
  Bottom 0.254: D13.1 65.8,13.65 v66.2,14.05
SD_DATA3  (via drill 0.35)
  Top 0.254: v65.1,14.05 SD1.2 65.1,19.4 v65.05,19.45 | v69.4,22.7 69.45,22.75 U3.25
  Bottom 0.254: D12.1 64.8,13.75 v65.1,14.05 | v65.05,19.45 68,19.45 69.4,20.85 v69.4,22.7
SMPS_IN  (via drill 0.35)
  Top 0.254: R1.2 10.4,36.3 v11.8,37.7 | v11.7,23.1 11.2,22.6 | 11.2,22.6 10.9,22.6 | 11.2,22.6 10.34,23.46 U1.7
  Bottom 0.254: v11.8,37.7 11.8,23.2 v11.7,23.1
  pour Top (no thermals): 5.9,12.2 7.4,12.2 7.9,12.7 7.9,14 11.4,17.5 11.4,20.6 11.2,20.8 11.2,23 10.8,23.4 10.8,25.4 10.1,25.4 10,25.3 10,23.2 9.6,22.8 9.6,17.6 5.9,13.9
SMPS_OUT  (via drill 0.35)
  Top 0.254: R4.1 3.65,28.55 v3.6,28.5 | 26.3,17.2 v27.8,17.2 26.16,18.84 C5.2
  Bottom 0.254: v3.6,28.5 3.6,18 5.4,16.2 27.8,16.2 v27.8,17.2
  pour Top (no thermals): 21.1,40.3 21.1,30.3 25.1,26.3 25.1,25.9 25,25.8 25,24.8 25.1,24.8 25.3,24.6 25.3,24.4 25.1,24.4 25,24.3 25,23.3 25.5,22.8 25.5,15.7 30.3,15.7 30.3,18.1 30.5,18.3 30.5,20.1 30.4,20.2 29,20.2 28.8,20.4 28.8,23.2 30.3,24.7 30.3,40.3
STATUS
  Top 0.3: U3.49 87.3,37.85 85.85,39.3 85.85,51.75 92.14,58.04 Q5.1
SW1
  Top 0.254: SW1.2 5.3,75.71 R8.2 2.57,76.53 C14.2 2.53,73.07 2.7,72.9 5.3,72.9 8,70.2 25,70.2 25.81,69.39 U2.58
SW2
  Top 0.254: U2.57 26.22,64.94 26.22,69.56 23.77,72 16.3,72 15.7,72.6 15.7,76.5 C20.2 15.49,76.62 R9.2 12.82,76.62 11.91,75.71 SW2.2
SWCLK
  Top 0.254: PROG.04 30.31,73.19 U2.49
SWDIO  (via drill 0.35)
  Top 0.254: PROG.01 33,77.99 33,66.3 v31.6,64.9 | v30.7,61.9 30.73,61.93 U2.46
  Bottom 0.254: v31.6,64.9 31.6,64.4 30.7,63.5 v30.7,61.9
USB_DN  (1 unrouted)
  Top 0.305: J1.D- 39.69,78.66 39.9,78.45 D6.4 | D6.3 39.9,73.25 39.5,72.85 39.5,69.05 46.25,62.3 46.25,40.5 49.19,37.56 57.81,37.56 58.15,37.9 59.8,37.9 U3.12
USB_DP  (1 unrouted)
  Top 0.305: J1.D+ 39.04,78.69 38.8,78.45 38.15,78.45 38,78.3 D6.6 | D6.1 38,73.95 38.9,73.05 38.9,69 45.7,62.2 45.7,40.3 48.9,37.1 57.8,37.1 58.05,36.85 U3.13
USB_VBUS
  Top 0.305: J1.VBUS 40.34,78.86 40.85,78.35 40.85,75.95 | U3.11 49.95,38.85 47.65,41.15 47.65,62.65 40.85,69.45 40.85,75.95 | D6.5 38.95,76.3 39.3,75.95 40.85,75.95
USIM_CLK
  Top 0.152: C48.2 41,21.34 R25.2 42.55,22.25 51.15,30.85 U3.19
USIM_DATA  (via drill 0.35)
  Top 0.152: C49.2 45.69,21.4 R26.2 v45.75,23.45 | v45.75,32.05 46.55,32.85 U3.17
  Bottom 0.152: v45.75,23.45 v45.75,32.05
USIM_RST  (via drill 0.35)
  Top 0.152: C45.2 48.89,21.34 R24.2 47.4,21.39 v47.4,23.5 | v47.45,29.1 47.45,29.85 49.45,31.85 U3.18
  Bottom 0.152: v47.45,29.1 47.4,29.05 v47.4,23.5
USIM_VDD  (via drill 0.35)
  Top 0.152: v48.2,15.5 SIM.C1 48.2,17.55 48.5,17.85 49.55,17.85 50.53,18.83 C46.2 C44.2 C47.2 54.63,19.68 55.1,20.15 55.1,29.75 55.2,29.85 U3.20
  Bottom 0.152: D7.3 45.25,11.8 45.35,11.9 47.8,11.9 48.2,12.3 v48.2,15.5
VBUS  (via drill 0.35)
  Top 0.2: U5.8 74.43,72.95 v75.4,72.95 | D17.5 83.9,76.84 83.9,78.05 v83.8,78.15 | J5.VBUS 85,78.85 v85.7,78.15
  Bottom 0.2: v85.7,78.15 v83.8,78.15 82.25,78.15 82.25,71.8 81.85,71.4 76.95,71.4 v75.4,72.95
VCC_LTEMODEM  (via drill 0.35)
  Top 0.152: v78.19,12.39 v78.2,12.4
  Top 0.2: R18.2 v78.19,12.39
  Top 0.3: C31.2 83.17,67.72 88.95,73.5 v88.95,81.9 | D16.A 94.43,81.88 v94.45,81.9 94.49,81.86 D15.A
  Bottom 0.2: v78.2,12.4 79.7,13.9 79.7,18.6 79.97,18.87 v82.88,18.87
  Bottom 0.3: v88.95,81.9 v94.45,81.9
  pour Top (no thermals): 81.6,10.6 81.7,10.7 81.7,12.5 82.3,13.1 85.2,13.1 85.3,13.2 85.3,16 84.8,16.5 84.8,21.1 83.8,22.1 83.8,25.6 82.1,25.6 82.1,21.9 81.6,21.4 81,21.4 80.9,21.3 80.9,16.6 80.4,16.1 80.4,10.7 80.5,10.6
  pour Top (no thermals): 82.2,24.2 82.2,26.7 79.9,29 79.9,47.9 82,50 82,55.7 81,56.7 81,62.2 81.5,62.7 83.6,62.7 84,62.3 84,61.4 83.8,61.2 83.8,24.4 83.6,24.2
VCCA  (via drill 0.35)
  Top 0.254: C17.2 19.63,56.93 U2.13 21.77,56.93 v22.3,56.4
  Bottom 0.254: v22.3,56.4 23.35,56.4 FL1.1